# Altium PCB test_board(1).PcbDoc (part 2 of 2)
Units mm, origin at the board's own origin, x right, y up, seen from the top; angles counter-clockwise.
Board outline 152.4 x 101.6 mm, 18 copper layers (F.Cu, F.Mask, B.Cu, B.Mask, F.SilkS, B.SilkS, F.Adhes, B.Adhes, F.Paste, B.Paste, Dwgs.User, Cmts.User, Eco1.User, Eco2.User, Edge.Cuts, Margin, B.CrtYd, F.CrtYd); 95 components, 140 nets, 510 pads, 121 vias.
Unrouted connection lines stored in the file: 95.
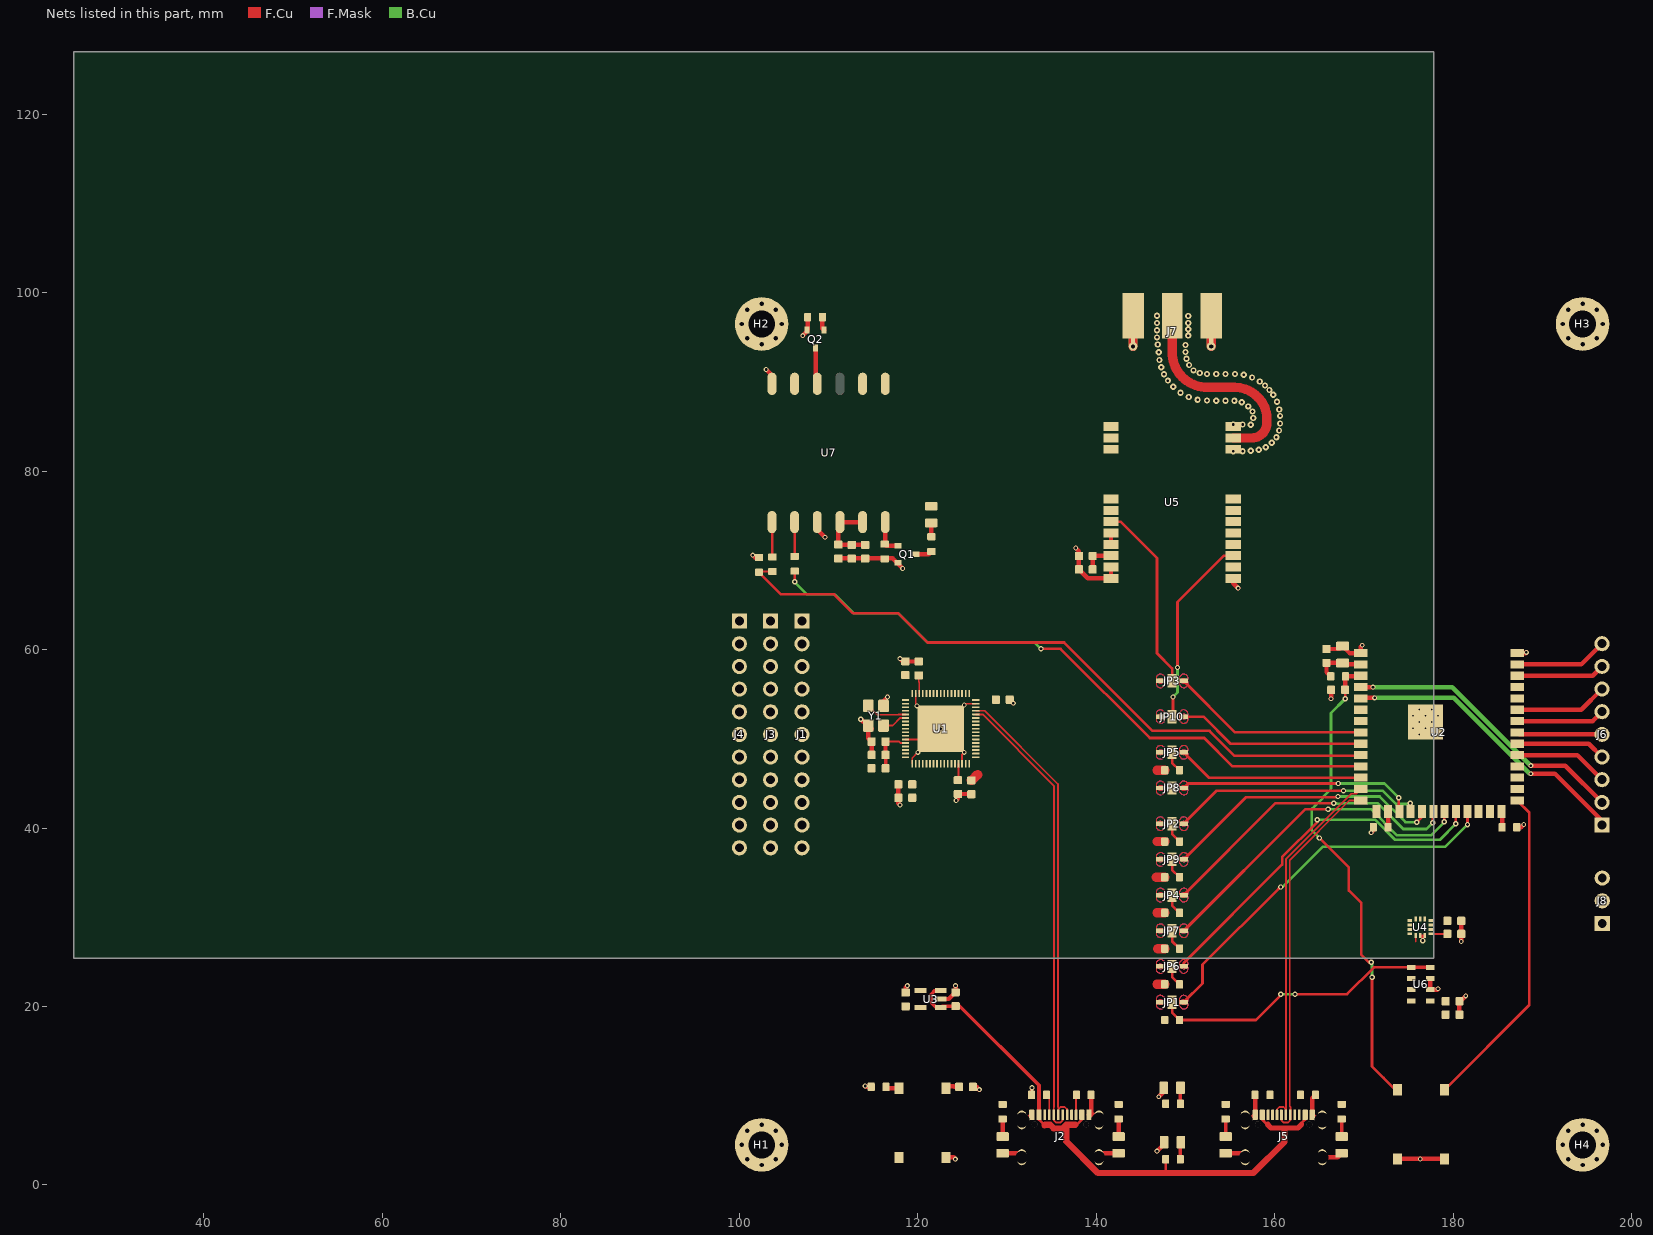
[diagram p10: the nets of this part, all layers, seen from the top]

## Part data
C1 C2 C3 C4 C5 C6 C7 C8 C9 C10 C12 C13 C14 C15 C16 C17 C18 C19 C20 C21 C22 C23 C24: library part C_0603_1608Metric, "Capacitor SMD 0603 (1608 Metric), square (rectangular) end terminal, IPC-7351 nominal, (Body size source: IPC-SM-782 page 76, https://www.pcb-3d.com/wordpress/wp-content/uploads/ipc-sm-782a_amendment_1_and_2.pdf), generated with kicad-footprint-generator", Datasheet=~, Description="Unpolarized capacitor", ki_fp_filters=C_*
C11: library part C_0805_2012Metric, "Capacitor SMD 0805 (2012 Metric), square (rectangular) end terminal, IPC-7351 nominal, (Body size source: IPC-SM-782 page 76, https://www.pcb-3d.com/wordpress/wp-content/uploads/ipc-sm-782a_amendment_1_and_2.pdf, https://docs.google.com/spreadsheets/d/1BsfQQcO9C6DZCsRaXUlFlo91Tg2WpOkGARC1WS5S8t0/edit?usp=sharing), generated with kicad-footprint-generator", Datasheet=~, Description="Unpolarized capacitor", ki_fp_filters=C_*
D1 D2 D3 D4 D5 D6 D7: library part LED_0805_2012Metric, "LED SMD 0805 (2012 Metric), square (rectangular) end terminal, IPC-7351 nominal, (Body size source: https://docs.google.com/spreadsheets/d/1BsfQQcO9C6DZCsRaXUlFlo91Tg2WpOkGARC1WS5S8t0/edit?usp=sharing), generated with kicad-footprint-generator", Datasheet=~, Description="Light emitting diode", Sim.Pins="1=K 2=A", ki_fp_filters="LED* LED_SMD:* LED_THT:*"
H1 H2 H3 H4: library part MountingHole_3mm_Pad_Via, "Mounting Hole 3mm, generated by kicad-footprint-generator mountinghole.py", Datasheet=~, Description="Mounting Hole with connection", ki_fp_filters=MountingHole*Pad*
J1 J3 J4: library part PinHeader_1x11_P2.54mm_Vertical, "Through hole straight pin header, 1x11, 2.54mm pitch, single row", Datasheet=~, Description="Generic connector, single row, 01x11, script generated", ki_fp_filters=Connector*:*_1x??_*
J2 J5: library part USB_C_Receptacle_GCT_USB4105-xx-A_16P_TopMnt_Horizontal, "USB 2.0 Type C Receptacle, GCT, 16P, top mounted, horizontal, 5A: https://gct.co/files/drawings/usb4105.pdf", Datasheet=https://www.usb.org/sites/default/files/documents/usb_type-c.zip, Description="USB 2.0-only 16P Type-C Receptacle connector", ki_fp_filters=USB*C*Receptacle*
J6: library part PinSocket_1x09_P2.54mm_Vertical, "Through hole straight socket strip, 1x09, 2.54mm pitch, single row (from Kicad 4.0.7), script generated", Datasheet=~, Description="Generic connector, single row, 01x09, script generated", ki_fp_filters=Connector*:*_1x??_*
J7: library part SMA_Molex_73251-1153_EdgeMount_Horizontal, "Molex SMA RF Connectors, Edge Mount, https://tools.molex.com/pdm_docs/sd/732511150_sd.pdf", Datasheet=~, Description="coaxial connector (BNC, SMA, SMB, SMC, Cinch/RCA, LEMO, ...)", ki_fp_filters="*BNC* *SMA* *SMB* *SMC* *Cinch* *LEMO* *UMRF* *MCX* *U.FL*"
J8: library part PinSocket_1x03_P2.54mm_Vertical, "Through hole straight socket strip, 1x03, 2.54mm pitch, single row (from Kicad 4.0.7), script generated", Datasheet=~, Description="Generic connector, single row, 01x03, script generated", ki_fp_filters=Connector*:*_1x??_*
JP1 JP2 JP3 JP4 JP5 JP6 JP7 JP8 JP9 JP10: library part SolderJumper-3_P1.3mm_Open_RoundedPad1.0x1.5mm_NumberLabels, "SMD Solder 3-pad Jumper, 1x1.5mm rounded Pads, 0.3mm gap, open, labeled with numbers", Datasheet=~, Description="Solder Jumper, 3-pole, open", ki_fp_filters=SolderJumper*Open*
L1: library part L_0603_1608Metric, "Inductor SMD 0603 (1608 Metric), square (rectangular) end terminal, IPC-7351 nominal, (Body size source: http://www.tortai-tech.com/upload/download/2011102023233369053.pdf), generated with kicad-footprint-generator", Datasheet=~, Description=Inductor, ki_fp_filters="Choke_* *Coil* Inductor_* L_*"
Q1 Q2: library part TRANS_SS8050-G, MAXIMUM_PACKAGE_HEIGHT="1.05 mm", Package="TO-236 Comchip", MANUFACTURER=Comchip, MF="Comchip Technology", Price=None, Check_prices=https://www.snapeda.com/parts/SS8050-G/Comchip/view-part/?ref=eda, STANDARD="Manufacturer Recommendations", PARTREV=A, SnapEDA_Link=https://www.snapeda.com/parts/SS8050-G/Comchip/view-part/?ref=snap, MP=SS8050-G, Description_1="Bipolar (BJT) Transistor NPN 25 V 1.5 A 100MHz 300 mW Surface Mount SOT-23-3", Availability="In Stock"
R1 R2 R3 R4 R5 R6 R7 R8 R9 R10 R11 R12 R13 R14 R15 R16 R17 R18 R19 R20 R21 R22 R23 R24 R25 R26 R27: library part R_0603_1608Metric, "Resistor SMD 0603 (1608 Metric), square (rectangular) end terminal, IPC-7351 nominal, (Body size source: IPC-SM-782 page 72, https://www.pcb-3d.com/wordpress/wp-content/uploads/ipc-sm-782a_amendment_1_and_2.pdf), generated with kicad-footprint-generator", Datasheet=~, Description=Resistor, ki_fp_filters=R_*
SW1 SW2 SW3 SW4: library part SW_Tactile_SPST_NO_Straight_CK_PTS636Sx25SMTRLFS, "Tactile switch, SPST, 6.0x3.5 mm, H2.5 mm, straight, NO, gull wing leads: https://www.ckswitches.com/media/2779/pts636.pdf", Datasheet=~, Description="Single Pole Single Throw (SPST) switch"
U1: library part QFN-68-1EP_8x8mm_P0.4mm_EP5.2x5.2mm, "QFN, 68 Pin (https://cdn.microsemi.com/documents/1bf6886f-5919-4508-a50b-b1dbf3fdf0f4/download/#page=98), generated with kicad-footprint-generator ipc_noLead_generator.py", Manufacturer_Part_Number=STM32H5RIV6, Datasheet=https://www.st.com/resource/en/datasheet/stm32h562ri.pdf, Description="STMicroelectronics Arm Cortex-M33 MCU, 2048KB flash, 640KB RAM, 250 MHz, 1.62-3.6V, 53 GPIO, VFQFPN68", Price=free, ki_fp_filters=QFN*1EP*8x8mm*P0.4mm*
U2: library part ESP32-S3-WROOM-1U, "2.4 GHz Wi-Fi and Bluetooth module  https://www.espressif.com/sites/default/files/documentation/esp32-s3-wroom-1_wroom-1u_datasheet_en.pdf", Datasheet=https://www.espressif.com/sites/default/files/documentation/esp32-s3-wroom-1_wroom-1u_datasheet_en.pdf, Description="RF Module, ESP32-S3 SoC, Wi-Fi 802.11b/g/n, Bluetooth, BLE, 32-bit, 3.3V, onboard antenna, SMD", ki_fp_filters=ESP32?S3?WROOM?1*
U3: library part SOT-23-5, "SOT, 5 Pin (JEDEC MO-178 Var AA https://www.jedec.org/document_search?search_api_views_fulltext=MO-178), generated with kicad-footprint-generator ipc_gullwing_generator.py", Datasheet=https://www.diodes.com/assets/Datasheets/AP2112.pdf, Description="600mA low dropout linear regulator, with enable pin, 3.8V-6V input voltage range, 3.3V fixed positive output, SOT-23-5", ki_fp_filters=SOT?23?5*
U4: library part LGA-14L_2P5X3X0P83_STM, Manufacturer_Part_Number=LSM6DSO32, Datasheet=https://www.st.com/resource/en/datasheet/lsm6dso32.pdf, Price=18.51zl, ki_fp_filters="LGA-14L_2P5X3X0P83_STM LGA-14L_2P5X3X0P83_STM-M LGA-14L_2P5X3X0P83_STM-L"
U5: library part WIRELM-SMD_22P-L20.0-W14.0-P1.27-BR, LCSC Part=C2971737
U6: library part LGA-8_3x5mm_P1.25mm, "LGA-8", Manufacturer_Part_Number=MS5611-01BA, Datasheet=https://www.te.com/commerce/DocumentDelivery/DDEController?Action=srchrtrv&DocNm=MS5611-01BA03&DocType=Data+Sheet&DocLang=English, Description="Barometric pressure sensor, 10cm resolution, 10 to 1200 mbar, I2C and SPI interface up to 20MHz, LGA-8", Price=free, ki_fp_filters=LGA*3x5mm*P1.25mm*
U7: library part XCVR_L86-M33, Package=None, Description="L86 is an ultra-compact GNSS POT _Patch on Top_ module with an embedded 18.4mm × 18.4mm × 4.0mm patch antenna and utilizes the MediaTek new generation GNSS chipset MT3333 that achieves the perfect performance", MF=Quectel, Price=None, Check_prices=https://www.snapeda.com/parts/L86-M33/Quectel/view-part/?ref=eda, SnapEDA_Link=https://www.snapeda.com/parts/L86-M33/Quectel/view-part/?ref=snap, MP=L86-M33, Availability="In Stock", Description_1="L86 is an ultra-compact GNSS POT (Patch on Top) module with an embedded 18.4mm × 18.4mm × 4.0mm patch antenna and utilizes the MediaTek new generation GNSS chipset MT3333 that achieves the perfect performance"
Y1: library part Crystal_SMD_3225-4Pin_3.2x2.5mm, "SMD3225/4, Crystal, 3.2x2.5mm package, SMD, generated with kicad-footprint-generator make_crystal.py, http://www.txccrystal.com/images/pdf/7m-accuracy.pdf", Datasheet=~, Description="Four pin crystal, GND on pins 2 and 4", Price=1.52$, ki_fp_filters=Crystal*

## Via types
v1: diameter 0.7, hole 0.3, F.Cu to B.Cu, tented both sides, 57 vias
v2: diameter 0.55, hole 0.3, F.Cu to B.Cu, tented both sides, 37 vias
v3: diameter 0.6, hole 0.3, F.Cu to B.Cu, tented both sides, 27 vias

## Nets (pads, with @x,y where several pads share a name; then routed paths per layer and width w, separated by ;. In a path a pad name is that pad's centre, name@x,y a point inside that pad or via, vN(x,y) a via of type N, cw(c..) or ccw(c..) an arc to the next point about the centre after c; other vN are vias at no path point)
1PPS: Q1.1 R23.2 U7.6 | length 4.1
  F.Cu w0.5: U7.6@116.35,74.285 116.35,71.86 R23.2@116.3,71.81 116.475,71.635 Q1.1@117.79,71.635
22S_BUSY: JP10.2 U5.14 | length 21.5
  F.Cu w0.3: JP10.2@148.5,52.485 148.6,52.585 v3(148.6,54.685) ; v3(149.1,57.985) 149.1,65.325 154.3,70.525 U5.14@155.35,70.525
  B.Cu w0.3: v3(148.6,54.685) 149.1,55.185 v3(149.1,57.985)
22S_CS: JP2.2 R21.2 U5.19 | length 2.3
  F.Cu w0.3: JP2.2@148.5,40.485 148.5,39.31 R21.2@149.325,38.485
22S_DIO1: JP8.2 U5.13
22S_RST: JP5.2 R20.1 U5.15 | length 2.3
  F.Cu w0.3: JP5.2@148.5,48.485 148.5,47.31 R20.1@149.325,46.485
22S_RXEN: JP3.2 U5.6 | length 21.3
  F.Cu w0.3: U5.6@141.65,74.335 142.7,74.335 146.8,70.235 146.8,59.585 148.5,57.885 JP3.2@148.5,56.485
+3.3V: C1.1 C5.1 C6.1 C7.1 C8.1 C11.2 C12.2 C15.2 C16.1 C17.2 C18.1 C19.2 C20.1 C21.2 C22.1 C23.1 C24.1 D7.2 J8.1 L1.1 R4.2 R9.1 R15.2 R16.2 R17.2 R18.2 R19.2 R20.2 R21.1 SW1.1 U1.1 U1.19 U1.33 U1.51 U1.68 U2.2 U3.5 U4.5 U4.8 U5.9 U6.1 U7.4 U7.5 | length 26.1
  F.Cu w0.2: 175.8,27.285 U4.5@175.8,27.958 ; U4.8@177.481,28.135 179.34,28.135 C20.1@179.35,28.125
  F.Cu w0.5: U7.5@113.81,74.285 U7.4@111.27,74.285 111.1,74.115 C22.1@111.1,71.76 111.125,71.735 C24.1@114.09,71.735 ; C19.2@139.6,68.985 C18.1@139.6,70.485 139.64,70.525 U5.9@141.65,70.525 ; R4.2@166.275,56.985 165.8,57.46 C12.2@165.8,58.51 167.575,58.51 C11.2@167.6,58.485 167.75,58.335 U2.2@169.654,58.335
  F.Cu w1.05: C6.1@126,45.335 126.05,45.335 126.7,45.985 ; 146.7,34.485 R18.2@147.675,34.485 ; 146.8,22.485 R19.2@147.675,22.485 ; 146.8,30.485 R16.2@147.675,30.485 ; 146.8,38.485 R21.1@147.675,38.485 ; 146.8,46.485 R20.2@147.675,46.485 ; 146.9,26.485 R17.2@147.675,26.485
+3.3VA: C9.1 C10.1 L1.2 U1.13 | length 5.3
  F.Cu w0.2: C10.1@116.375,49.685 117.9,49.685 118.05,49.535 U1.13@118.625,49.535
  F.Cu w0.4: L1.2@116.375,46.698 L1.2@116.387,46.685 116.387,48.172 C9.1@116.375,48.185 C10.1@116.375,49.685
BOOTesp: SW3.1 U2.27 | length 36.9
  F.Cu w0.3: SW3.1@179,10.66 188.521,20.181 188.521,41.728 U2.27@187.154,43.095
CS_LSM1: JP6.2 R19.1 U4.12 | length 2.3
  F.Cu w0.3: JP6.2@148.5,24.485 148.5,23.31 R19.1@149.325,22.485
CS_MS5611: JP1.2 R15.1 U6.4 U6.5 | length 33
  F.Cu w0.3: JP1.2@148.5,20.485 148.5,19.31 R15.1@149.325,18.485 157.875,18.485 160.675,21.285 v3(160.675,21.385) ; v3(162.276,21.385) 168.1,21.385 171.1,24.385 U6.5@175.281,24.385
  F.Cu w0.4: U6.5@175.281,24.385 U6.4@177.431,24.385
  B.Cu w0.3: v3(160.675,21.385) v3(162.276,21.385)
esp22S_BUSY: JP10.3 U2.9 | length 21.1
  F.Cu w0.3: JP10.3@149.8,52.485 152,52.485 155.04,49.445 U2.9@169.654,49.445
esp22S_CS: JP2.3 U2.18 | length 28.5
  F.Cu w0.3: JP2.3@149.8,40.485 153.5,44.185 v3(167.7,44.185) ; v3(175.2,42.785) 175.2,41.874 U2.18@175.229,41.845
  B.Cu w0.3: v3(167.7,44.185) 172.1,44.185 173.6,42.685 175.1,42.685 v3(175.2,42.785)
esp22S_DIO1: JP8.3 U2.17 | length 26.5
  F.Cu w0.3: JP8.3@149.8,44.485 150.3,44.985 v3(167.1,44.985) ; v3(173.9,43.385) 173.9,41.904 U2.17@173.959,41.845
  B.Cu w0.3: v3(167.1,44.985) 172.3,44.985 v3(173.9,43.385)
esp22S_RST: JP5.3 U2.12 | length 21
  F.Cu w0.3: JP5.3@149.8,48.485 152.65,45.635 U2.12@169.654,45.635
esp22S_RXEN: JP3.3 U2.8 | length 22.2
  F.Cu w0.3: JP3.3@149.8,56.485 155.57,50.715 U2.8@169.654,50.715
espCS_LSM1: JP6.3 U2.22 | length 41.2
  F.Cu w0.3: JP6.3@149.8,24.485 149.8,24.885 160.824,35.909 160.824,36.747 164.776,40.699 v3(164.776,40.909) ; v3(180.3,40.485) 180.3,41.836 U2.22@180.309,41.845
  B.Cu w0.3: v3(164.776,40.909) 171.267,40.909 173.492,38.684 178.499,38.684 v3(180.3,40.485)
espCS_MS5611: JP1.3 U2.23 | length 42.7
  F.Cu w0.3: JP1.3@149.8,20.485 151.9,22.585 151.9,24.685 160.4,33.185 160.475,33.185 v3(160.675,33.385) ; U2.23@181.579,41.845 181.6,41.824 v3(181.6,40.385)
  B.Cu w0.3: v3(160.675,33.385) 160.875,33.385 165.375,37.885 179.1,37.885 v3(181.6,40.385)
espLED_1: R11.1 U2.24
espLED_2: R12.1 U2.25
espSPI_CLK: JP4.3 U2.20 | length 35
  F.Cu w0.3: JP4.3@149.8,32.485 160.1,42.785 v3(166.6,42.785) ; v3(177.7,40.585) 177.7,41.776 U2.20@177.769,41.845
  B.Cu w0.3: v3(166.6,42.785) 166.934,42.785 166.984,42.736 167.523,42.736 167.572,42.785 171.5,42.785 174.4,39.885 177,39.885 v3(177.7,40.585)
espSPI_MISO: JP7.3 U2.21 | length 37.9
  F.Cu w0.3: JP7.3@149.8,28.485 163.424,42.109 v3(165.976,42.109) ; v3(179,40.685) 179,41.806 U2.21@179.039,41.845
  B.Cu w0.3: v3(165.976,42.109) 170.776,42.109 173.7,39.185 177.5,39.185 v3(179,40.685)
espSPI_MOSI: JP9.3 U2.19 | length 31.4
  F.Cu w0.3: JP9.3@149.8,36.485 156.751,43.436 v3@166.87,43.436 ; v3(175.916,40.655) 176.499,41.238 U2.19@176.499,41.845
  B.Cu w0.3: v3(167.083,43.535) 171.75,43.535 174.63,40.655 v3(175.916,40.655)
FORCE_ON: U2.6 U7.7
GND: C1.2 C2.2 C3.2 C4.1 C5.2 C6.2 C7.2 C8.2 C9.2 C10.2 C11.1 C12.1 C13.1 C14.1 C15.1 C16.2 C17.1 C18.2 C19.1 C20.2 C21.1 C22.2 C23.2 C24.2 D1.1 D2.1 D3.1 D4.1 D5.1 D6.1 H1.1 H2.1 H3.1 H4.1 J2.A1 J2.A12 J2.B1 J2.B12 J2.S1 J5.A1 J5.A12 J5.B1 J5.B12 J5.S1 J7.2 J8.3 Q1.2 Q2.2 R1.1 R2.2 R3.1 R5.2 R6.2 R7.2 R8.1 R23.1 R24.1 R27.2 SW2.1 SW3.2 SW4.2 U1.12 U1.18 U1.32 U1.50 U1.67 U1.69 U2.1 U2.40 U2.41 U3.2 U4.6 U4.7 U5.1 U5.2 U5.3 U5.4 U5.10 U5.11 U5.12 U5.20 U5.22 U6.2 U6.3 U7.3 U7.12 Y1.2 Y1.4 | length 116.3
  F.Cu w0.2: U1.12@118.625,49.935 121.363,49.935 v2(122.563,51.135) ; U1.18@119.362,47.198 119.362,47.847 v2(120,48.485) ; U1.67@119.763,55.073 119.763,53.823 v2(119.9,53.685) ; U1.32@124.963,47.198 124.963,48.248 v2(125.2,48.485) ; v2(125.2,53.785) 125.35,53.935 U1.50@126.5,53.935 ; v3(176.6,27.385) 176.6,27.685 ; U4.7@176.8,27.958 176.6,27.958 ; U4.6@176.3,27.958 176.427,27.958 176.6,27.785 ; U4.6@176.3,27.958 176.327,27.958 176.6,27.685 ; U4.6@176.3,27.958 176.6,27.958 ; 176.6,27.685 176.6,27.785 ; 176.6,27.785 176.6,27.958
  F.Cu w0.4: R2.2@132.75,10.085 132.75,10.835 v3(132.8,10.885)
  F.Cu w0.5: v2(101.5,70.585) 101.775,70.31 R27.2@102.2,70.31 ; v2(103,91.385) 103.65,90.735 U7.12@103.65,89.785 ; v2(107.1,95.185) 107.587,95.673 Q2.2@107.587,95.795 107.652,95.86 R24.1@107.652,97.26 ; U7.3@108.73,74.285 108.73,73.455 v2(109.6,72.585) ; C22.2@111.1,70.21 117.175,70.21 v2(118.3,69.085) ; v3(113.6,52.185) 114.3,51.485 Y1.4@114.45,51.485 ; v2(114.1,11.085) 114.2,10.985 R1.1@114.775,10.985 ; C9.2@114.825,48.185 C10.2@114.825,49.685 114.45,50.06 Y1.4@114.45,51.485 ; Y1.4@114.825,51.11 Y1.4@114.45,51.485 ; Y1.2@116.15,53.587 Y1.2@116.15,53.685 116.15,54.235 v2(116.6,54.685) ; C5.2@117.825,44.885 C1.2@117.825,43.385 117.825,42.76 v2(118,42.585) ; v2(118,58.985) 118.3,58.685 C8.2@118.6,58.685 118.625,58.66 C3.2@120.1,58.66 ; C15.1@118.626,21.561 118.626,22.136 v2(118.826,22.336) ; U3.2@122.564,20.836 123.476,20.836 C14.1@124.226,21.586 v2(124.226,22.336) ; SW2.1@123.15,3.085 124,3.085 v2(124.2,2.885) ; v2(124.3,43.085) 124.5,43.285 C2.2@124.5,43.81 125.975,43.81 C6.2@126,43.785 ; C4.1@126.175,10.985 126.6,10.985 v2(126.9,10.685) ; D6.1@129.5,3.548 131.217,3.548 J2.S1@131.66,3.105 ; C7.2@130.3,54.385 v2(130.7,53.985) ; J2.S1@131.66,7.285 132.205,7.285 J2.B12@132.78,7.86 J2.B12@132.75,7.89 ; v2(137.7,71.385) 138.05,71.035 C18.2@138.05,70.485 C19.1@138.05,68.985 139.05,67.985 U5.11@141.65,67.985 U5.10@141.65,69.255 ; R3.1@139.425,10.085 139.425,8.105 J2.B1@139.18,7.86 139.725,7.86 J2.S1@140.3,7.285 ; J2.S1@140.3,3.105 140.742,3.548 D5.1@142.5,3.548 ; v2(146.8,3.785) 147.6,4.585 D2.1@147.6,4.785 ; v2(147,9.885) 147.562,10.448 D1.1@147.563,10.885 ; D3.1@154.5,3.548 156.238,3.548 J5.S1@156.68,3.105 ; U5.12@155.35,67.985 155.35,67.435 v2(155.9,66.885) ; J5.S1@156.68,7.285 157.225,7.285 J5.B12@157.8,7.86 R7.2@157.8,10.085 ; R8.1@164.55,10.085 164.2,9.735 J5.B1@164.2,7.86 164.775,7.285 J5.S1@165.32,7.285 ; J5.S1@165.32,3.105 167.057,3.105 D4.1@167.5,3.548 ; C12.1@165.8,60.06 167.275,60.06 C11.1@167.6,60.385 168.38,59.605 U2.1@169.654,59.605 169.654,60.339 v2(169.8,60.485) ; v2(166.3,54.485) 166.325,54.51 C13.1@166.325,55.485 ; v2(170.8,39.485) 171.05,39.735 R6.2@171.05,40.085 ; SW4.2@173.75,2.91 v2(176.3,2.91) ; v2@176.4,2.91 v2(176.3,2.91) ; U6.3@177.431,23.135 U6.2@177.431,21.885 178.2,21.885 v2(178.3,21.985) ; SW3.2@179,2.91 v2(176.3,2.91) ; C17.1@180.7,19.085 C16.2@180.7,20.585 180.8,20.585 v2(181.4,21.185) ; v2(180.9,27.285) C20.2@180.9,28.125 C21.1@180.9,29.585 ; R5.2@187.125,40.085 187.6,40.085 v2(187.9,40.385) ; U2.40@187.154,59.605 188.12,59.605 v2(188.2,59.685)
  F.Cu w1.05: J7.2@144.12,93.975 J7.2@144.12,97.415 ; J7.2@152.88,93.975 J7.2@152.88,97.415
  B.Cu w1.05: J7.2@144.12,93.975 J7.2@144.12,97.415 ; J7.2@152.88,93.975 J7.2@152.88,97.415
  other v1: 155.35,82.215 156.397,82.215 157.3,82.285 158.2,82.385 159,82.685 159.649,83.185 160.183,83.804 160.489,84.542 157.3,85.185 155.35,85.215 156.397,85.215 160.6,85.334 157.6,85.948 160.6,86.185 157.5,86.685 160.507,86.908 157.016,87.249 156.313,87.726 160.247,87.76 153.456,87.885 154.485,87.885 155.478,87.885 152.4,87.912 151.353,87.992 150.352,88.297 159.828,88.547 149.428,88.789 159.4,89.085 148.616,89.449 158.9,89.585 158.325,90.038 148.024,90.14 157.461,90.498 156.525,90.784 147.589,90.855 152.4,90.885 153.456,90.885 154.485,90.885 155.552,90.885 151.6,90.985 150.9,91.285 147.269,91.628 150.4,91.885 147.071,92.441 150.1,92.585 147,93.311 150,93.348 150,94.132 146.9,94.185 146.805,94.985 150.3,95.185 146.805,95.785 150.3,95.885 146.8,96.594 150.3,96.594 150.3,97.385 146.805,97.415
GPS_RST: Q2.3 U7.10 | length 4.1
  F.Cu w0.5: Q2.3@108.537,93.775 108.537,89.978 U7.10@108.73,89.785
IO1: J6.9 U2.39 | length 10.5
  F.Cu w0.5: U2.39@187.154,58.335 194.355,58.335 J6.9@196.675,60.655
IO2: J6.8 U2.38 | length 10
  F.Cu w0.5: U2.38@187.154,57.065 195.625,57.065 J6.8@196.675,58.115
IO4: J6.2 U2.4 | length 32.4
  F.Cu w0.5: U2.4@169.654,55.795 169.664,55.785 v2(171,55.785) ; v2(188.7,46.985) 192.565,46.985 J6.2@196.675,42.875
  B.Cu w0.5: v2(171,55.785) 179.9,55.785 v2(188.7,46.985)
IO5: J6.1 U2.5 | length 33.2
  F.Cu w0.5: U2.5@169.654,54.525 169.714,54.585 v2(171.2,54.585) ; v2(188.7,46.085) 191.4,46.085 196.675,40.81 J6.1@196.675,40.335
  B.Cu w0.5: v2(171.2,54.585) 180.073,54.585 188.573,46.085 v2(188.7,46.085)
IO38: J6.3 U2.31 | length 10.7
  F.Cu w0.5: U2.31@187.154,48.175 193.915,48.175 J6.3@196.675,45.415
IO39: J6.4 U2.32 | length 10.1
  F.Cu w0.5: U2.32@187.154,49.445 195.185,49.445 J6.4@196.675,47.955
IO40: J6.5 U2.33 | length 9.6
  F.Cu w0.5: U2.33@187.154,50.715 187.374,50.495 J6.5@196.675,50.495
IO41: J6.6 U2.34 | length 10
  F.Cu w0.5: U2.34@187.154,51.985 195.625,51.985 J6.6@196.675,53.035
IO42: J6.7 U2.35 | length 10.5
  F.Cu w0.5: U2.35@187.154,53.255 194.355,53.255 J6.7@196.675,55.575
l86_rst: Q2.1 R24.2 U2.7 | length 1.5
  F.Cu w0.5: R24.2@109.302,97.26 109.302,95.98 Q2.1@109.488,95.795
Net-(C2-Pad1): C2.1 U1.31 | length 1.9
  F.Cu w0.2: C2.1@124.5,45.36 124.562,45.422 U1.31@124.563,47.198
Net-(C3-Pad1): C3.1 U1.66 | length 2.1
  F.Cu w0.2: C3.1@120.1,57.11 120.1,56.385 120.163,56.323 U1.66@120.163,55.073
Net-(D1-A): D1.2 R9.2 | length 1.8
  F.Cu w0.4: R9.2@149.425,9.085 149.425,10.873 D1.2@149.437,10.885
Net-(D2-A): D2.2 R10.2 | length 1.9
  F.Cu w0.4: R10.2@149.425,2.885 149.425,4.735 D2.2@149.475,4.785
Net-(D3-A): D3.2 R11.2 | length 2
  F.Cu w0.4: D3.2@154.5,5.422 R11.2@154.5,7.385
Net-(D4-A): D4.2 R12.2 | length 2
  F.Cu w0.4: D4.2@167.5,5.422 R12.2@167.5,7.385
Net-(D5-A): D5.2 R13.2 | length 2
  F.Cu w0.5: D5.2@142.5,5.422 R13.2@142.5,7.385
Net-(D6-A): D6.2 R14.2 | length 2
  F.Cu w0.5: D6.2@129.5,5.422 R14.2@129.5,7.385
Net-(D7-K): D7.1 R22.1 | length 1.6
  F.Cu w0.5: D7.1@121.5,74.185 121.5,72.668 R22.1@121.525,72.642
Net-(J2-CC1): J2.A5 R2.1 | length 2.4
  F.Cu w0.2: R2.1@134.4,10.085 134.73,9.755 J2.A5@134.73,7.86
Net-(J2-CC2): J2.B5 R3.2 | length 2.2
  F.Cu w0.2: J2.B5@137.73,7.86 137.73,10.04 R3.2@137.775,10.085
Net-(J5-CC1): J5.A5 R7.1
Net-(J5-CC2): J5.B5 R8.2
Net-(J7-In): J7.1 U5.21 | length 24.1
  F.Cu w1.05: J7.1@148.5,97.415 148.5,93.311 ccw(c152.426,93.311) 149.65,90.535 ccw(c152.426,93.311) 152.426,89.385 155.515,89.385 cw(c155.515,85.8) 158.05,88.335 158.181,88.204 cw(c155.962,85.985) 159.1,85.985 159.1,85.371 cw(c157.444,85.371) 158.615,84.2 cw(c157.444,85.371) 157.444,83.715 U5.21@155.35,83.715
Net-(Q1-Pad3): Q1.3 R22.2 | length 1.8
  F.Cu w0.5: Q1.3@119.81,70.685 121.217,70.685 R22.2@121.525,70.992
Net-(SW1-B): R1.2 SW1.2 U1.62 | length 1.5
  F.Cu w0.5: R1.2@116.425,10.985 116.575,10.835 SW1.2@117.9,10.835
Net-(SW2-B): C4.2 SW2.2 U1.7 | length 1.6
  F.Cu w0.5: SW2.2@123.15,10.835 123.4,11.085 124,11.085 124.1,10.985 C4.2@124.625,10.985
Net-(U1-PH0): U1.5 Y1.3 | length 4.6
  F.Cu w0.2: Y1.3@114.45,53.685 115.451,52.684 117.799,52.684 117.85,52.735 U1.5@118.625,52.735
Net-(U1-PH1): U1.6 Y1.1 | length 2.8
  F.Cu w0.2: Y1.1@116.15,51.485 117.2,51.485 118.05,52.335 U1.6@118.625,52.335
Net-(U2-IO45): R5.1 U2.26 | length 1.8
  F.Cu w0.5: U2.26@185.389,41.845 185.475,41.759 R5.1@185.475,40.085
Net-(U2-IO46): R6.1 U2.16 | length 1.8
  F.Cu w0.5: U2.16@172.689,41.845 172.7,41.834 R6.1@172.7,40.085
Net-(U5-DIO2): U5.7 U5.8 | length 1.3
  F.Cu w0.5: U5.8@141.65,71.795 U5.7@141.65,73.065
Net-(U7-RXD1): R25.1 U7.1 | length 3.9
  F.Cu w0.3: U7.1@103.65,74.285 103.7,74.235 R25.1@103.7,70.385
Net-(U7-TXD1): R26.1 U7.2 | length 3.9
  F.Cu w0.3: U7.2@106.19,74.285 106.2,74.275 R26.1@106.2,70.435
PA0: J1.9 U1.14
PA1: J1.10 U1.15
PA2: J1.11 U1.16
PA3: J3.1 U1.17
PA4: J3.2 U1.20
PA7: J3.3 U1.23
PA8: J3.4 U1.44
PA10: J3.5 U1.46
PA13: J3.6 U1.49
PA14: J3.7 U1.52
PA15: J3.8 U1.53
PB0: J3.9 U1.26
PB1: J3.10 U1.27
PB2: J3.11 U1.28
PB3: J4.1 U1.57
PB4: J4.2 U1.58
PB5: J4.3 U1.59
PB6: J4.4 U1.60
PB7: J4.5 U1.61
PB8: J4.6 U1.63
PB9: J4.7 U1.64
PB12: J4.8 U1.34
PB13: J4.9 U1.35
PB14: J4.10 U1.36
PB15: J4.11 U1.37
PC4: J1.3 U1.24
PC5: J1.4 U1.25
PC6: J1.5 U1.40
PC7: J1.6 U1.41
PC8: J1.7 U1.42
PC9: J1.8 U1.43
PD11: J1.1 U1.38
PD12: J1.2 U1.39
RSTesp: C13.2 R4.1 SW4.1 U2.3 | length 54
  F.Cu w0.3: v3(165.004,38.881) 168.3,35.585 168.3,32.985 169.7,31.585 169.7,25.785 170.523,24.962 v3(170.811,24.962) ; C13.2@167.875,55.485 167.9,55.46 v3(167.9,54.485) ; v3(170.906,23.279) 170.9,23.273 170.9,22.685 170.9,13.285 172.2,11.985 173.525,10.66 SW4.1@173.75,10.66
  F.Cu w0.5: C13.2@167.875,55.485 167.925,55.535 R4.1@167.925,56.985 169.574,56.985 U2.3@169.654,57.065
  B.Cu w0.3: v3(165.004,38.881) 164.13,39.755 164.13,42.115 164.5,42.485 165.4,43.385 165.4,43.485 166.3,44.385 166.3,45.685 166.3,52.885 v3(167.9,54.485) ; v3(170.811,24.962) 170.906,24.867 v3(170.906,23.279)
RX_GPS: R26.2 U2.11 | length 73.2
  F.Cu w0.3: v3(106.2,67.585) R26.2@106.2,68.785 ; v3(133.8,60.085) 136,60.085 146,50.085 152.1,50.085 155.28,46.905 U2.11@169.654,46.905
  B.Cu w0.3: v3(106.2,67.585) 107.6,66.185 108,66.185 110.7,66.185 112.8,64.085 117.8,64.085 121.1,60.785 123.7,60.785 133.1,60.785 v3(133.8,60.085)
SPI_CLK: JP4.2 R16.1 U4.13 U5.18 U6.8 | length 2.3
  F.Cu w0.3: JP4.2@148.5,32.485 148.5,31.31 R16.1@149.325,30.485
SPI_MISO: JP7.2 R17.1 U4.1 U5.16 U6.6 | length 2.3
  F.Cu w0.3: JP7.2@148.5,28.485 148.5,27.31 R17.1@149.325,26.485
SPI_MOSI: JP9.2 R18.1 U4.14 U5.17 U6.7 | length 2.3
  F.Cu w0.3: JP9.2@148.5,36.485 148.5,35.31 R18.1@149.325,34.485
stm22S_BUSY: JP10.1 U1.11
stm22S_CS: JP2.1 U1.2
stm22S_DIO1: JP8.1 U1.9
stm22S_RST: JP5.1 U1.8
stm22S_RXEN: JP3.1 U1.4
stmCS_LSM1: JP6.1 U1.10
stmCS_MS5611: JP1.1 U1.45
stmI2C_SCL: U1.29
stmI2C_SDA: U1.30
stmLED_1: R13.1 U1.21
stmLED_2: R14.1 U1.22
stmSPI_CLK: JP4.1 U1.54
stmSPI_MISO: JP7.1 U1.55
stmSPI_MOSI: JP9.1 U1.56
TX_GPS: R25.2 R27.1 U2.10 | length 77.5
  F.Cu w0.2: R27.1@102.2,68.66 102.275,68.735 R25.2@103.7,68.735
  F.Cu w0.3: R27.1@102.2,68.66 104.675,66.185 110.6,66.185 112.7,64.085 117.8,64.085 121.1,60.785 136.4,60.785 146.3,50.885 152.7,50.885 155.5,48.085 169.564,48.085 U2.10@169.654,48.175
unconnected-(J2-SBU1-PadA8): J2.A8
unconnected-(J2-SBU2-PadB8): J2.B8
unconnected-(J5-SBU1-PadA8): J5.A8
unconnected-(J5-SBU2-PadB8): J5.B8
unconnected-(U1-PC14-Pad3): U1.3
unconnected-(U1-PE0-Pad65): U1.65
unconnected-(U2-IO3-Pad15): U2.15
unconnected-(U2-IO35-Pad28): U2.28
unconnected-(U2-IO36-Pad29): U2.29
unconnected-(U2-IO37-Pad30): U2.30
unconnected-(U2-RXD0-Pad36): U2.36
unconnected-(U2-TXD0-Pad37): U2.37
unconnected-(U3-NC-Pad4): U3.4
unconnected-(U4-INT1-Pad4): U4.4
unconnected-(U4-INT2-Pad9): U4.9
unconnected-(U4-NC-Pad10): U4.10
unconnected-(U4-NC-Pad11): U4.11
unconnected-(U4-SCx-Pad3): U4.3
unconnected-(U4-SDx-Pad2): U4.2
unconnected-(U5-DIO3-Pad5): U5.5
unconnected-(U7-AADET_N-Pad8): U7.8
unconnected-(U7-EX_ANT-Pad11): U7.11
USBesp_DN: J5.A7 J5.B7 U2.13 | length 42.8
  F.Cu w0.2: J5.B7@160.25,7.86 160.25,8.469 160.517,8.736 160.983,8.736 161.25,8.469 J5.A7@161.25,7.86 161.25,8.723 161.275,8.748 161.275,36.56 168.561,43.846 169.135,43.846 U2.13@169.654,44.365
USBesp_DP: J5.A6 J5.B6 U2.14 | length 41.8
  F.Cu w0.2: J5.A6@160.75,7.86 160.75,7.251 161.017,6.984 161.483,6.984 161.75,7.251 J5.B6@161.75,7.86 161.75,8.723 161.676,8.797 161.676,36.394 168.377,43.095 U2.14@169.654,43.095
USBstm_DN: J2.A7 J2.B7 U1.47 | length 51.4
  F.Cu w0.2: U1.47@126.5,52.735 127.01,52.735 127.011,52.734 127.255,52.734 135.255,44.734 135.255,8.748 135.23,8.723 J2.B7@135.23,7.86 135.23,7.251 135.497,6.984 135.963,6.984 136.23,7.251 J2.A7@136.23,7.86
USBstm_DP: J2.A6 J2.B6 U1.48 | length 52.1
  F.Cu w0.2: U1.48@126.5,53.135 127.491,53.135 135.705,44.921 135.705,8.748 135.73,8.723 J2.A6@135.73,7.86 135.73,8.469 135.997,8.736 136.463,8.736 136.73,8.469 J2.B6@136.73,7.86
VBUS: C14.2 J2.A4 J2.A9 J2.B4 J2.B9 J5.A4 J5.A9 J5.B4 J5.B9 J8.2 R10.1 U3.1 U3.3 | length 67.2
  F.Cu w0.3: J2.B9@133.58,7.86 133.58,7.322 134.2,6.702 134.2,6.685 ; 137.8,6.742 138.38,7.322 J2.B4@138.38,7.86 ; 147.7,1.336 147.775,1.411 R10.1@147.775,2.885 ; J5.B9@158.6,7.86 158.6,7.322 159.137,6.785 159.2,6.785 ; 163,6.784 163,6.922 163.4,7.322 J5.B4@163.4,7.86
  F.Cu w0.4: U3.3@122.564,21.786 121.901,21.786 121.5,21.385 121.5,20.454 122.068,19.886 U3.1@122.564,19.886 122.714,20.036 C14.2@124.226,20.036 124.701,20.036 133.58,11.157 J2.B9@133.58,7.86
  F.Cu w0.6: 159.2,6.785 159.602,6.383 162.599,6.383 163,6.784
  F.Cu w0.7: 134.2,6.685 134.249,6.734 134.827,6.734 135.228,6.333 136.232,6.333 136.633,6.734 ; 137.651,6.734 136.633,6.734 ; 161.1,6.333 161.1,4.836 157.6,1.336 147.7,1.336 140.183,1.336 136.633,4.885 136.633,6.734
pads on no net: J2.Un1 J2.Un2 J5.Un1 J5.Un2 U1.Un1 U1.Un2 U1.Un3 U1.Un4 U1.Un5 U1.Un6 U1.Un7 U1.Un8 U1.Un9 U1.Un10 U1.Un11 U1.Un12 U1.Un13 U1.Un14 U1.Un15 U1.Un16 U2.Un1 U2.Un2 U2.Un3 U2.Un4 U2.Un5 U2.Un6 U2.Un7 U2.Un8 U2.Un9 U7.9
copper on no net: | length 399.3
  Edge.Cuts w0.254: 98.5,5.485 ccw(c103.5,5.485) 103.5,0.485 ; 98.5,5.485 ccw(c103.5,5.485) 103.5,0.485 ; 98.5,5.485 98.5,95.485 cw(c103.5,95.485) 103.5,100.485 193.5,100.485 cw(c193.5,95.485) 198.5,95.485 198.5,5.485 cw(c193.5,5.485) 193.5,0.485 103.5,0.485

## Polygon pours and split planes (outlines as drawn)
+3.3V on F.Cu "F.Cu-+3.3V" (solid, remove dead copper, pour order 3): 198.5,100.485 98.5,100.485 98.5,0.485 198.5,0.485
GND on F.Cu "F.Cu-GND" (solid, remove dead copper, pour order 2): 138.8,100.485 139.2,76.185 152.9,76.185 152.9,77.985 162.6,77.985 162.7,100.485
GND on B.Cu "B.Cu-GND" (solid, remove dead copper, pour order 1): 198.5,100.485 98.5,100.485 98.5,0.485 198.5,0.485

## Other copper
F.SilkS:
  text "IO1" at 191.3,58.635 h1.5
  text "IO2" at 191,56.035 h1.5
  text "IO42" at 189.6,53.635 h1.5
  text "IO41" at 189.9,51.135 h1.5
  text "IO40" at 189.6,48.735 h1.5
  text "IO39" at 189.7,45.935 h1.5
  text "IO38" at 189.7,43.335 h1.5
  text "IO4" at 190.9,40.835 h1.5
  text "IO5" at 191.1,38.335 h1.5
  text "GND" at 189.9,32.335 h1.5
  text "5v" at 191.9,29.835 h1.5
  text "3.3v" at 190,27.335 h1.5
  text "STM32" at 130.5,9.385 h2
  text "ESP32" at 155.8,9.385 h2

## Silkscreen, mask and mechanical layers (free items; w line width, h text height)
User.1:
  lines w0.254: 98.5,50.485 198.5,50.485 ; 148.5,0.485 148.5,100.485 ; 98.5,0.485 198.5,100.485 ; 98.5,0.485 198.5,0.485 ; 98.5,0.485 98.5,100.485 ; 98.5,100.485 198.5,100.485 ; 98.5,100.485 198.5,0.485 ; 198.5,0.485 198.5,100.485

## Text inside footprints (layer, text, board x,y; h text height)
J2: Dwgs.User "PCB Edge" at 134.232,0.647 h0.5
J5: Dwgs.User "PCB Edge" at 159.252,0.647 h0.5
U4: F.Fab "*" at 174.998,29.449 h1; F.Fab "*" at 174.998,29.449 h1; F.SilkS "*" at 173.829,29.449 h1